# EAGLE board driver ckt_2 (EAGLE 8.4.3)

Size 100 x 80 mm. Coordinates in mm from the lower left corner, seen from the top.
Outline: 0,0 100,0 100,80 0,80 0,0
Copper layers (1*16): Top 0.035mm / dielectric 1.5mm / Bottom 0.035mm
Design rules "default": minimum track width 6mil, minimum drill 0.35mm, track to track 6mil, track to pad 6mil, pad to pad 6mil, via to via 6mil, smd to smd 6mil, copper to edge 40mil, drill to drill 6mil, minimum pad ring 10mil, minimum via ring 8mil, stop-mask expansion 4mil, vias tented up to drill 0mil, thermal gap 10mil

## Footprints (pad centres in the part's own frame; a part is rotated, then mirrored left to right if it is on the bottom)
1X05 = drill 1.016 long: 1 -5.08,0; 2 -2.54,0; 3 0,0; 4 2.54,0; 5 5.08,0
DIL06 = drill 0.813 offset: 1 -2.54,-3.81; 2 0,-3.81; 3 2.54,-3.81; 4 2.54,3.81; 5 0,3.81; 6 -2.54,3.81
SOT23-EBC = smd 1 x 1.4: B 0.95,-1.1; C 0,1.1; E -0.95,-1.1
R1206 = smd 1.6 x 1.803: 1 -1.422,0; 2 1.422,0
02P = drill 0.914 long: 1 -1.27,0; 2 1.27,0
TO220BV = drill 1.016 long: G 2.54,-2.54; T1 -2.54,-2.54; T2 0,-2.54

## Placement (x,y rotation side)
JP1  [1X05]  25.58,27.15 90 top
OK1  MOC3021M  [DIL06]  46.45,28.4 0 top
OK2  MOC3021M  [DIL06]  35.02,28.4 0 top
OK3  MOC3021M  [DIL06]  58.15,28.4 0 top
Q1  [SOT23-EBC]  49.42,19.74 0 top
Q2  [SOT23-EBC]  37.42,19.82 0 top
Q3  [SOT23-EBC]  62.42,19.9 0 top
R11  [R1206]  45.02,21.15 180 top
R12  [R1206]  32.99,20.5 180 top
R13  [R1206]  57.25,21.5 180 top
R21  [R1206]  40.5,22.77 270 top
R22  [R1206]  28.5,23.09 270 top
R23  [R1206]  52.58,22.77 270 top
R31  [R1206]  40.5,28.85 270 top
R32  [R1206]  28.93,29.5 270 top
R33  [R1206]  52.5,29.17 270 top
SL1  [02P]  46.47,38.47 180 top
SL2  [02P]  29.82,38.47 180 top
SL3  [02P]  63.17,38.47 180 top
T1  BT138-V  [TO220BV]  54.72,40.64 0 top
T2  BT138-V  [TO220BV]  38.29,40.64 0 top
T3  BT138-V  [TO220BV]  67.36,28.15 270 top

## Library data of the parts
JP1 = pinhead
OK1-OK3 = optocoupler; MF: FAIRCHILD SEMICONDUCTOR; MPN: MOC3021-M; OC_FARNELL: 1021365; OC_NEWARK: 95B7895
Q1-Q3 = transistor
R11-R13 R21-R23 R31-R33 = eagle-ltspice; SPICEMODEL: NONE; SPICEPREFIX: R
SL1-SL3 = con-amp-quick; OC_FARNELL: unknown; OC_NEWARK: unknown
T1-T3 = triac

## Nets
+5V: JP1.1 R21.1 R22.1 R23.1
IN1: JP1.3 R11.2
IN2: JP1.4 R12.2
IN3: JP1.5 R13.2
N$1: OK1.6 R31.2
N$2: R31.1 SL1.1 T1.T2
N$3: SL1.2 T1.T1
N$4: OK1.1 R21.2
N$5: OK1.2 Q1.C
N$6: OK2.4 T2.G
N$7: OK1.4 T1.G
N$8: OK2.6 R32.2
N$9: Q1.B R11.1
N$10: R32.1 SL2.1 T2.T2
N$11: Q2.B R12.1
N$12: SL2.2 T2.T1
N$13: OK2.1 R22.2
N$14: OK2.2 Q2.C
N$15: OK3.4 T3.G
N$16: OK3.6 R33.2
N$17: R33.1 SL3.1 T3.T2
N$18: Q3.B R13.1
N$19: SL3.2 T3.T1
N$20: OK3.1 R23.2
N$21: OK3.2 Q3.C
PE: JP1.2 Q1.E Q2.E Q3.E

## Tracks (layer width: path | path; a pad name or v marks a point on that pad's centre or on a via)
+5V  (3 unrouted)
IN1  (1 unrouted)
IN2  (1 unrouted)
IN3  (1 unrouted)
N$1  (1 unrouted)
N$2  (2 unrouted)
N$3  (1 unrouted)
N$4  (1 unrouted)
N$5  (1 unrouted)
N$6  (1 unrouted)
N$7  (1 unrouted)
N$8  (1 unrouted)
N$9  (1 unrouted)
N$10  (2 unrouted)
N$11  (1 unrouted)
N$12  (1 unrouted)
N$13  (1 unrouted)
N$14  (1 unrouted)
N$15  (1 unrouted)
N$16  (1 unrouted)
N$17  (2 unrouted)
N$18  (1 unrouted)
N$19  (1 unrouted)
N$20  (1 unrouted)
N$21  (1 unrouted)
PE  (3 unrouted)
(copper drawn outside any net)
  shapes: Top area x2